# Altium PCB PCB.PcbDoc
Units mil, origin at the board's own origin, x right, y up, seen from the top; angles counter-clockwise.
Board outline 750 x 765 mil, 2 copper layers (Top Layer, Bottom Layer); 4 components, 6 nets, 12 pads, 6 vias.
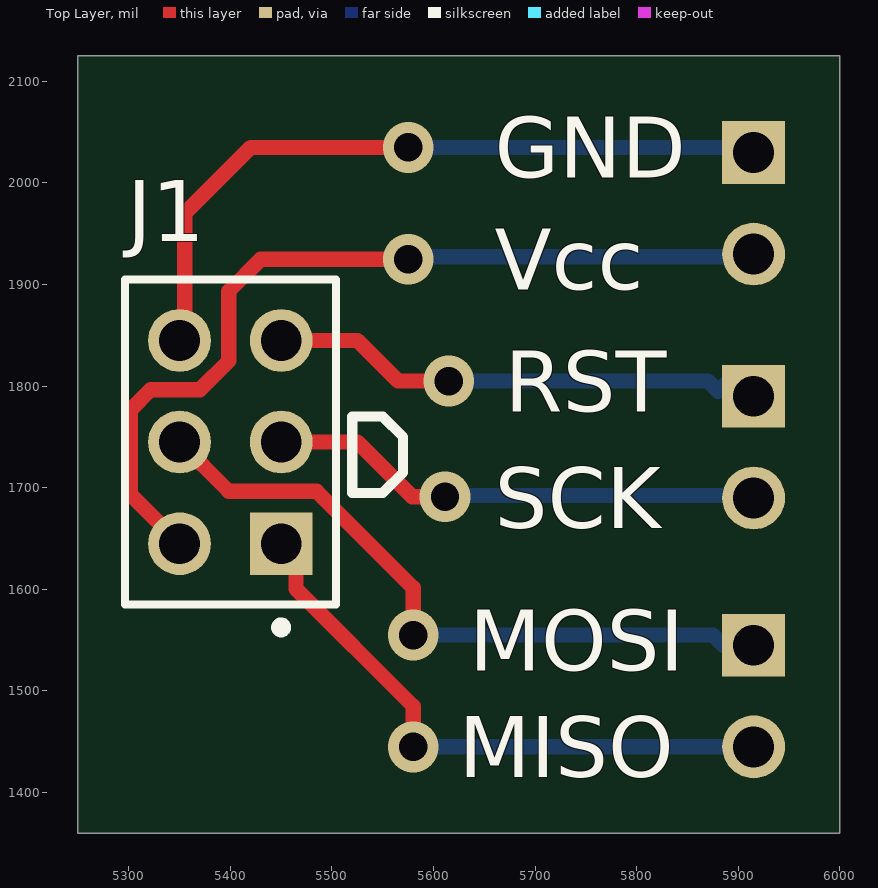
[diagram p0: Top Layer view]
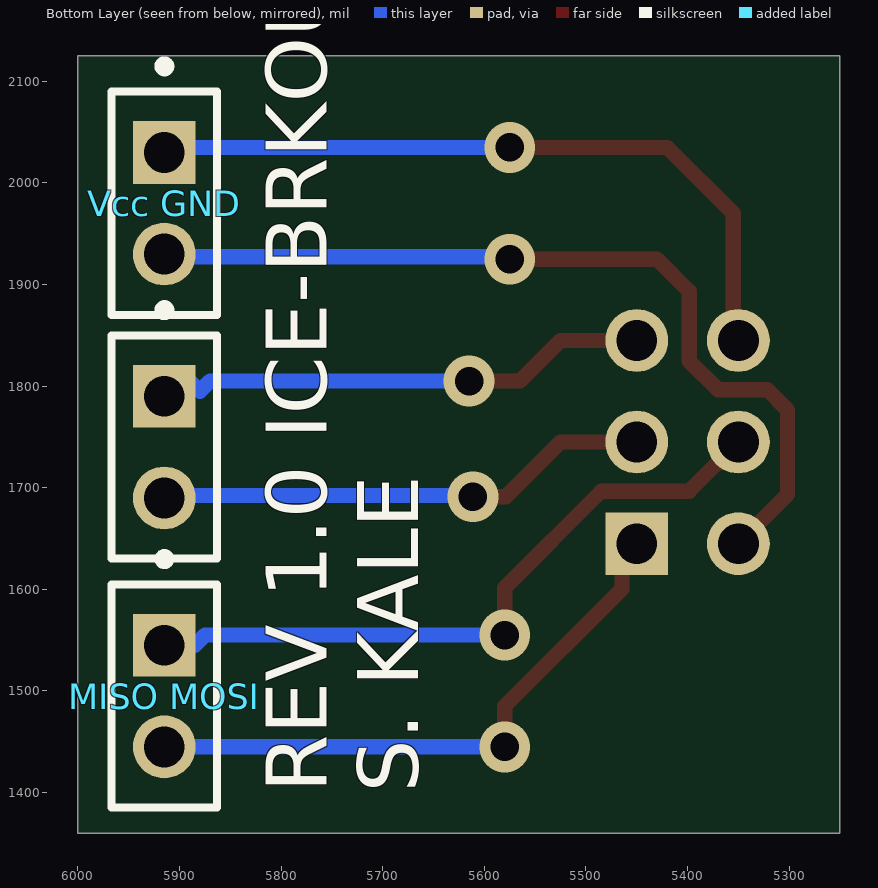
[diagram p1: Bottom Layer view, seen from below]
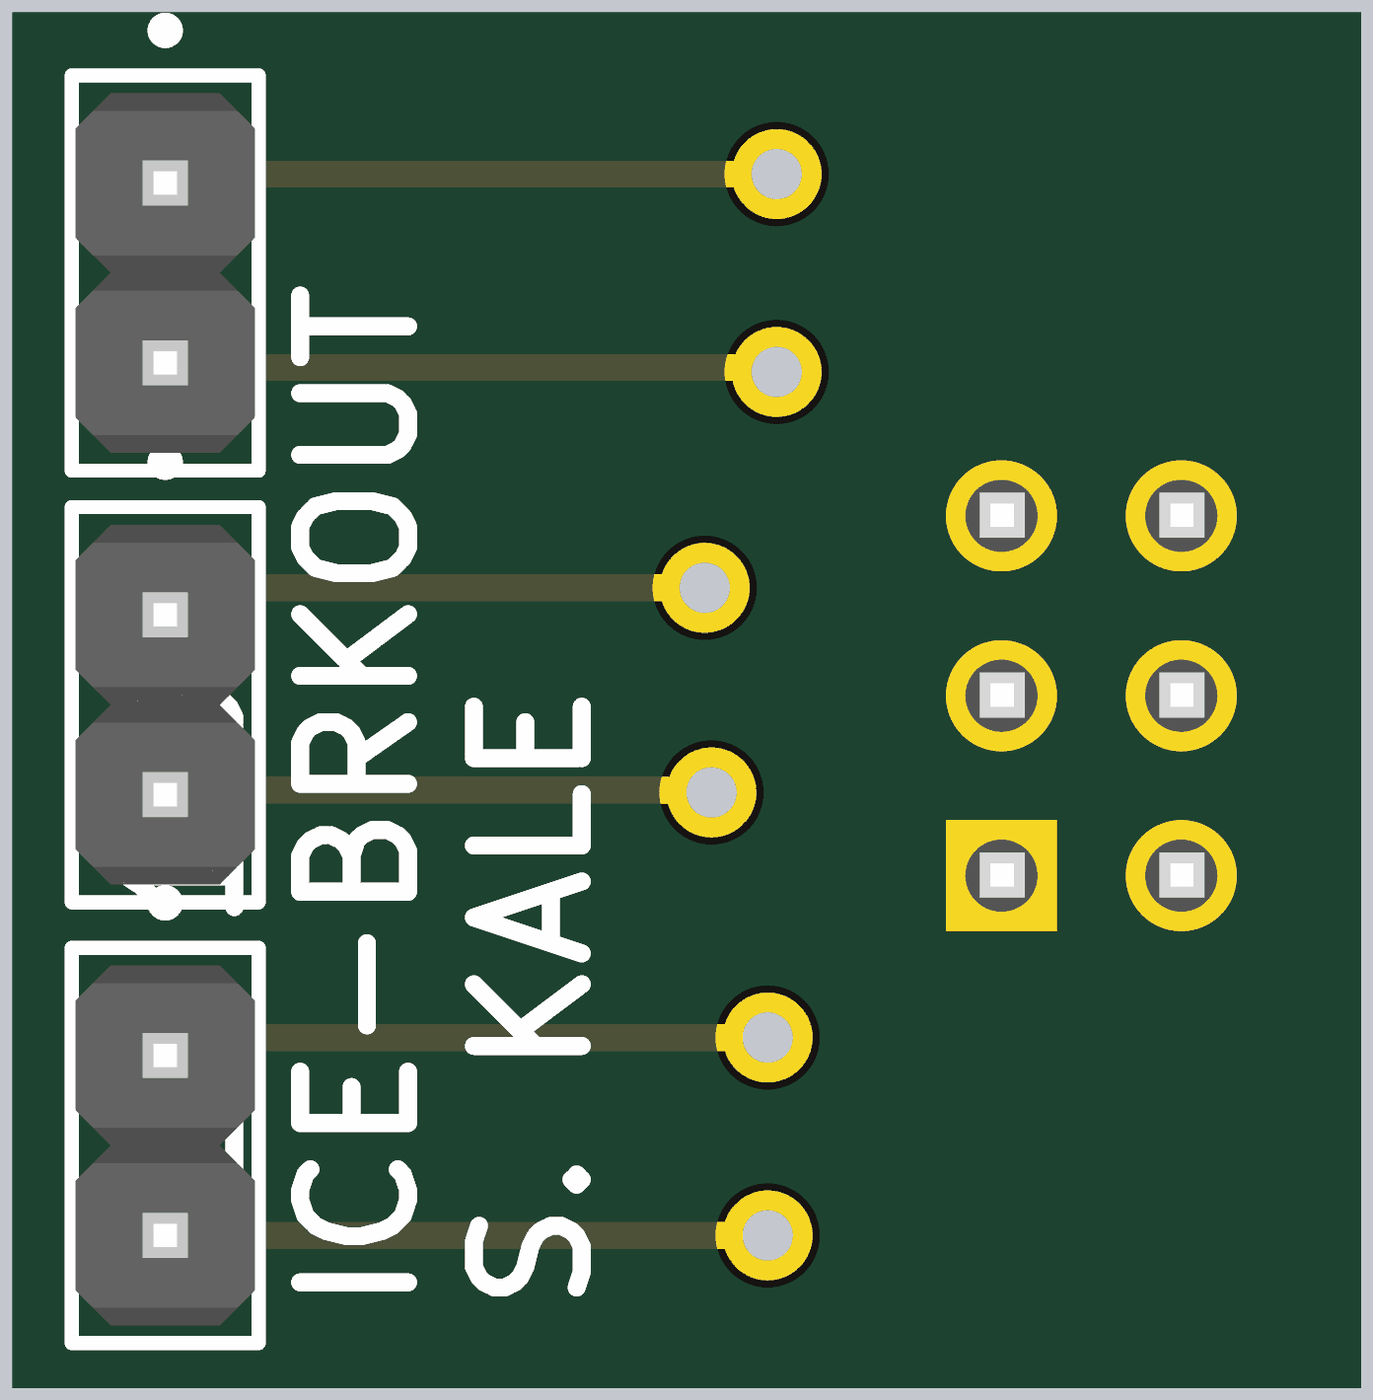
[diagram p2: 3D render of the assembled board from below, using the file's embedded part models]

## Layer stack, top to bottom
Top Solder: solder mask 0.4, Solder Resist, Dk 3.5
Top Layer: signal copper 1.4
Dielectric 1: dielectric 12.6, FR-4, Dk 4.8
Bottom Layer: signal copper 1.4
Bottom Solder: solder mask 0.4, Solder Resist, Dk 3.5

## Board outline
5250,1360 6000,1360 6000,2125 5250,2125

## Design rules (kind name [scope] priority, off if disabled: settings)
Clearance [All] p1: gap=10 ignorepadtopadclearanceinfootprint=FALSE except(0: Arc-Hole Track-Hole SMDPad-Hole THPad-Hole Via-Hole Fill-Hole Poly-Hole Region-Hole Text-Hole)
PolygonConnect [All] p1: connectstyle=Relief reliefconductorwidth=10 reliefentries=4 polygonreliefangle="90 Angle" airgapwidth=10
RoutingVias [All] p1: holewidth=28 width=50 viastyle="Through Hole" minholewidth=28 minwidth=50 maxholewidth=28 maxwidth=50
SolderMaskExpansion [All] p1: expansion=4 istentingtop=FALSE
Width [All] p1: maxlimit=15 minlimit=15 preferedwidth=15
30 further rules are at their usual default settings.

## Components (designator, comment, footprint, x,y, rotation, side; value= is the part's Value field where it differs from the comment)
J1 "M20-9980346" FP-M20-9980346-MFG 5400,1745 r90 top
"MISO MOSI" "M20-9990246" FP-M20-9990246-MFG 5915,1495 r270 bottom
"SCK RST" "M20-9990246" FP-M20-9990246-MFG 5915,1740 r270 bottom
"Vcc GND" "M20-9990246" FP-M20-9990246-MFG 5915,1980 r270 bottom

## Footprints (in the part's own frame and the unit in brackets; to place one, negate y for a bottom-side part, rotate by r counter-clockwise, add the part's x,y. Pads: shape width x height; smd on the part's side, far side on the other; paste and mask are expansions set on the pad)
FP-M20-9980346-MFG [mm]
  rect 1.57x1.57 hole 1.02 paste-1000 mask+0: 1(-2.54,-1.27)
  round 1.57 hole 1.02 paste-1000 mask+0: 2(-2.54,1.27) 3(0,-1.27) 4(0,1.27) 5(2.54,-1.27) 6(2.54,1.27)
  silkscreen extent -4.76,-2.64 4.06,2.64, body extent -4.16,-2.74 4.16,2.74, height 0.25
FP-M20-9990246-MFG [mm]
  rect 1.57x1.57 hole 1.02 paste-1000 mask+0: 1(-1.27,0)
  round 1.57 hole 1.02 paste-1000 mask+0: 2(1.27,0)
  silkscreen extent -3.55,-1.32 2.79,1.32, body extent -2.54,-1.27 2.54,1.27, height 8.99

## Part data
J1: library part CMP-2000-06636-2, "CONN HEADER VERT 6POS 2.54MM", Current Rating=3A, Manufacturer=Harwin, Temperature="-40°C to +105°C", Temperature Range High=+105°C, Temperature Range Low=-40°C, Automotive=No, Category=Conn, ComponentLink2Description=Datasheet, ComponentLink2URL=https://cdn.harwin.com/pdfs/M20-998.pdf, Conn Gender=Male, Conn Orientation=Vertical, Contact Material=Tin,Nickel, Device Class L1=Connectors, Device Class L2="Headers and Wire Housings", Device Class L3=unset, Digikey Description="CONN HEADER VERT 6POS 2.54MM", Height=8.99mm, Lead Free=Yes, Manufacturer Part Number=M20-9980346, Mouser Description="2.54mm (0.1\") Pitch DIL Vertical PC Tail Pin Header, 6.1mm mating pin height, tin, 3+3 contacts", Number Of Contacts=6, Number Of Rows=2, Octopart=https://octopart.com/m20-9980346-harwin-5436545, Package=M20-9980346, Pitch=2.54mm, RoHS=TRUE
"MISO MOSI" "SCK RST" "Vcc GND": library part CMP-15831-000009-1, "CONN HEADER VERT 2POS 2.54MM", Current Rating=3A, Manufacturer=Harwin, Temperature="-40°C to +105°C", Temperature Range High=+105°C, Temperature Range Low=-40°C, Automotive=No, Category=Conn, ComponentLink2Description=Datasheet, ComponentLink2URL=https://cdn.harwin.com/pdfs/M20-999.pdf, Conn Gender=Male, Conn Orientation=Vertical, Contact Material=Tin,Nickel, Device Class L1=Connectors, Device Class L2="Headers and Wire Housings", Device Class L3=unset, Digikey Description="CONN HEADER VERT 2POS 2.54MM", Height=8.99mm, Lead Free=Yes, Manufacturer Part Number=M20-9990246, Mouser Description="2.54mm (0.1\") Pitch SIL Vertical PC Tail Pin Header, 6.1mm mating pin height, tin, 2 contacts", Number Of Contacts=2, Number Of Rows=1, Octopart=https://octopart.com/m20-9990246-harwin-2590635, Package=M20-9990246, Pitch=2.54mm, RoHS=TRUE

## Via types
v1: diameter 50, hole 28, Top Layer to Bottom Layer, 6 vias

## Nets (pads, with @x,y where several pads share a name; then routed paths per layer and width w, separated by ;. In a path a pad name is that pad's centre, name@x,y a point inside that pad or via, vN(x,y) a via of type N, cw(c..) or ccw(c..) an arc to the next point about the centre after c; other vN are vias at no path point)
GND: "Vcc GND.1" J1.6 | length 719.9
  Top Layer w15: J1.6@5350,1848.81 J1.6 5355,1850 5355,1970 5420,2035 v1(5575,2035)
  Bottom Layer w15: v1(5575,2035) 5910,2035 5915,2030
NetJ1_1: "MISO MOSI.2" J1.1 | length 588.8
  Top Layer w15: J1.1 5464.62,1630.38 5464.62,1600.38 5580,1485 v1(5580,1445)
  Bottom Layer w15: v1(5580,1445) 5915,1445
NetJ1_3: "SCK RST.2" J1.3 | length 488.8
  Top Layer w15: J1.3 5525,1745 5578.75,1691.25 v1(5611.25,1691.25)
  Bottom Layer w15: v1(5611.25,1691.25) 5612.5,1692.5 5912.5,1692.5 5915,1690
NetJ1_4: "MISO MOSI.1" J1.4 | length 687.5
  Top Layer w15: J1.4 5398.41,1696.59 5484.97,1696.59 5580,1601.56 v1(5580,1555)
  Bottom Layer w15: v1(5580,1555) 5875,1555 5885,1545 5900,1560 5915,1545
NetJ1_5: "SCK RST.1" J1.5 | length 500.2
  Top Layer w15: J1.5 5525,1845 5565,1805 v1(5615,1805)
  Bottom Layer w15: v1(5615,1805) 5870,1805 5880,1795 5895,1810 5915,1790
VCC: "Vcc GND.2" J1.2 | length 868.7
  Top Layer w15: J1.2 5301.59,1693.41 5301.59,1776.59 5321.59,1796.59 5370.05,1796.59 5398.41,1824.95 5398.41,1893.41 5430,1925 v1(5575,1925)
  Bottom Layer w15: v1(5575,1925) 5577.5,1927.5 5912.5,1927.5 5915,1930

## Silkscreen, mask and mechanical layers (free items; w line width, h text height)
Top Overlay:
  lines w10: 5520,1695 5520,1770 5550,1770 5570,1750 5570,1715 5550,1695 5520,1695
  text "GND" at 5660,2005 h60
  text "Vcc" at 5660,1895 h60
  text "RST" at 5670,1775 h60
  text "SCK" at 5660,1660 h60
  text "MOSI" at 5635,1520 h60
  text "MISO" at 5625,1415 h60
Bottom Overlay:
  text "REV 1.0 ICE-BRKOUT / S. KALE" at 5665,1400 h60 r270